# Altium PCB MacLayout.PcbDoc (part 2 of 2)
Units mil, origin at the board's own origin, x right, y up, seen from the top; angles counter-clockwise.
Board outline 5984.25 x 2047.24 mil, 4 copper layers (Top Layer, Int2 (Sign), Int3 (Sign), Bottom Layer), stack 58.312 mil thick; 135 components, 109 nets, 624 pads, 48 vias.
Unrouted connection lines stored in the file: 142.
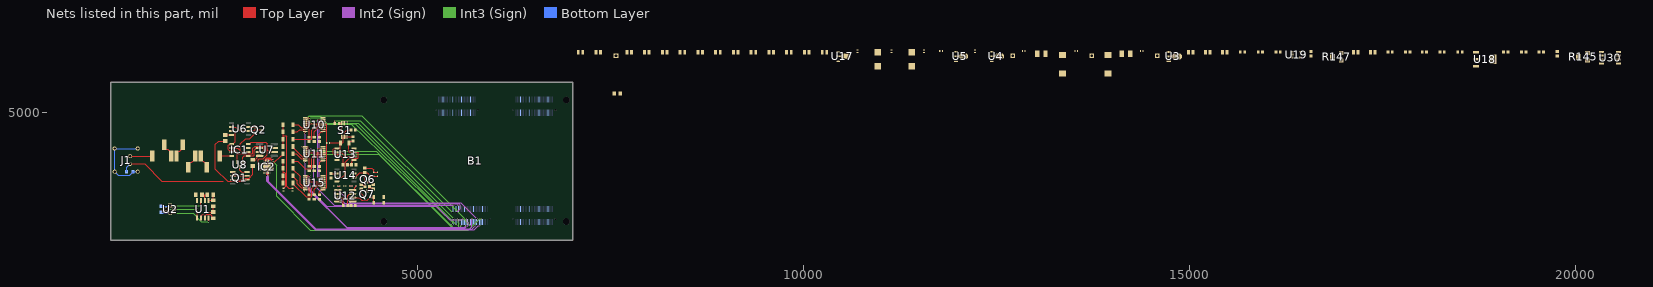
[diagram p4: the nets of this part, all layers, seen from the top]

## Part data (continued)
U1 U13 U30: library part CMP-0272-00256-3, "11 MHz, Precision, Low Noise, Rail-to-Rail Output, JFET Operational Amplifier, 4.5 to 36 V, -40 to 125 degC, 8-pin SOIC (D8), Green (RoHS & no Sb/Br)", Manufacturer="Texas Instruments", Rating=Catalog, Total Supply Voltage(Max)(+5V is 5, +/-5V is 10)=36, Total Supply Voltage(Min)(+5V is 5, +/-5V is 10)=4.5, CMRR(Min)(dB)=126, Code_JEDEC=MS-012, ComponentLink1Description="Manufacturer URL", ComponentLink1URL=http://www.ti.com/, ComponentLink2Description=Datasheet, ComponentLink2URL=http://www.ti.com/lit/ds/symlink/opa2140.pdf, ComponentLink3Description="Package Specification", ComponentLink3URL=http://www.ti.com/litv/pdf/msoi002j, DatasheetVersion=SBOS498A, Eco-Plan="Green (RoHS & no Sb/Br)", GBW(Typ)(MHz)=11, IIB(Max)(pA)=10, Iq per channel(Max)(mA)=2, Mounting Technology="Surface Mount", Number of Channels=2, Offset Drift(Typ)(uV/C)=0.35, PackageDescription="8-Pin Plastic Small Outline, Body 4.9 x 3.9 mm, Pitch 1.27 mm", PackageReference=D0008A, PackageVersion="4040047-3/M, 06/2011", Packing="LARGE T&R", PartNumber=OPA2140AIDR, Slew Rate(Typ)(V/us)=20, Sub Family="High Supply Voltage Amplifier (>=30V), Low Input Bias Current Amp (<=10pA), Low Noise Amp (<=10nV/rtHz), Low Offset Voltage Amplifier (<=500uV), Precision Amplifier", Vio (25C)(Max)(mV)=0.12
U2: library part CMP-09137-000115-1, "IC VREF SHUNT 0.17% TO46-4", Case/Package=TO-46, Cathode Current=500uA, Max Operating Temperature=70°C, Max Output Voltage=6.95V, Min Operating Temperature=0°C, Output Current=10mA, Package Quantity=20, Temperature Coefficient=1ppm/°C, Tolerance=2%, Mount="Through Hole", Number of Channels=1, Number of Pins=4, Output Voltage=6.95V, Packaging=Rail/Tube, Radiation Hardening=No, Reference Type=Shunt, RoHS Compliant=Yes
U3: library part CMP-0244-00386-1, "Positive Voltage Regulator, 15V, 4-Pin SOT-89, Tape and Reel", ComponentLink1Description="Manufacturer URL", ComponentLink1URL=http://www.st.com, ComponentLink2Description=Datasheet, ComponentLink2URL=http://www.st.com/internet/com/TECHNICAL_RESOURCES/TECHNICAL_LITERATURE/DATASHEET/CD00000446.pdf, DatasheetVersion=1/02/2011, PackageDescription="3-Pin SOT-89 Package 1.5 mm Pitch, 4.1 mm Lead Span", PackageReference=SOT-89, PackageVersion=2011
U4: library part CMP-0244-00408-1, "Negative Voltage Regulator, -15V, 4-Pin SOT-89, Tape and Reel", ComponentLink1Description="Manufacturer URL", ComponentLink1URL=http://www.st.com, ComponentLink2Description=Datasheet, ComponentLink2URL=http://www.st.com/internet/com/TECHNICAL_RESOURCES/TECHNICAL_LITERATURE/DATASHEET/CD00000539.pdf, DatasheetVersion=1/07/2009, PackageDescription="3-Pin SOT-89 Package 1.5 mm Pitch, 4.1 mm Lead Span", PackageReference=SOT-89, PackageVersion=2011
U5: library part CMP-0244-00406-1, "Positive Voltage Regulator, 5V, 4-Pin SOT-89, Tape and Reel", ComponentLink1Description="Manufacturer URL", ComponentLink1URL=http://www.st.com, ComponentLink2Description=Datasheet, ComponentLink2URL=http://www.st.com/internet/com/TECHNICAL_RESOURCES/TECHNICAL_LITERATURE/DATASHEET/CD00000446.pdf, DatasheetVersion=1/02/2011, PackageDescription="3-Pin SOT-89 Package 1.5 mm Pitch, 4.1 mm Lead Span", PackageReference=SOT-89, PackageVersion=2011
U6 U14: library part CMP-0271-00131-3, "11 MHz, Single Supply, Low Noise, Precision, Rail-to-Rail Output, JFET Amplifier, 4.5 to 36 V, -40 to 125 degC, 8-pin SOIC (D8), Green (RoHS & no Sb/Br)", Manufacturer="Texas Instruments", Rating=Catalog, Total Supply Voltage(Max)(+5V is 5, +/-5V is 10)=36, Total Supply Voltage(Min)(+5V is 5, +/-5V is 10)=4.5, CMRR(Min)(dB)=126, Code_JEDEC=MS-012, ComponentLink1Description="Manufacturer URL", ComponentLink1URL=http://www.ti.com/, ComponentLink2Description=Datasheet, ComponentLink2URL=http://www.ti.com/lit/ds/symlink/opa140.pdf, ComponentLink3Description="Package Specification", ComponentLink3URL=http://www.ti.com/litv/pdf/msoi002j, DatasheetVersion=SBOS498A, Eco-Plan="Green (RoHS & no Sb/Br)", GBW(Typ)(MHz)=11, IIB(Max)(pA)=10, Iq per channel(Max)(mA)=2, Mounting Technology="Surface Mount", Number of Channels=1, Offset Drift(Typ)(uV/C)=0.35, PackageDescription="8-Pin Plastic Small Outline, Body 4.9 x 3.9 mm, Pitch 1.27 mm", PackageReference=D0008A, PackageVersion="4040047-3/M, 06/2011", Packing=TUBE, PartNumber=OPA140AID, Slew Rate(Typ)(V/us)=20, Sub Family="High Supply Voltage Amplifier (>=30V), Low Input Bias Current Amp (<=10pA), Low Noise Amp (<=10nV/rtHz), Low Offset Voltage Amplifier (<=500uV), Precision Amplifier", Vio (25C)(Max)(mV)=0.12
U7: library part CMP-0359-03002-2, "Single Channel, Low Noise High Speed Operational Amplifier, 20 MHz Typical GBW, 6 V/us Typical SR, 8 to 44 V, 8-Pin SOIC (S8-8), Commercial, Pb-Free", Linear Technology Part Number=LT1128, Manufacturer="Linear Technology", Channels (#)=1, ComponentLink1Description="Manufacturer URL", ComponentLink1URL=http://www.linear.com/, ComponentLink2Description=Datasheet, ComponentLink2URL=http://cds.linear.com/docs/en/datasheet/1028fb.pdf, ComponentLink3Description="Package Specification", ComponentLink3URL=http://cds.linear.com/docs/en/packaging/05081610_G_SO8.pdf, DatasheetVersion="Rev. B", GBW (MHz) Typical=20, Is (mA) Typical=7.4, Mounting Technology="Surface Mount", PackageDescription="8-Pin Plastic Small Outline, Body 4.9 x 3.9 mm, Pitch 1.27 mm", PackageReference=LT-S8-8, PackageVersion="Rev G", PartNumber=LT1128CS8#PBF, RevisionNote="URLs updated", RoHS=Pb-Free, SR (V/us) Typical=6, Type=VFB, Vos (mV) Typical=0.01, Vs Max (V)=44, Vs Min (V)=8
U8: library part CMP-0023-00636-1, "30k 2 kV ESD Precision-Matched Resistor-Divider, -40 to 85 degC, 3-pin SOT (U3+2), Pb-Free, Tape and Reel", PartNumber=MAX5491LC01000+T, Applications="Precision Voltage Divider", Code_JEDEC=TO236, ComponentLink1Description="Manufacturer URL", ComponentLink1URL=http://www.maximintegrated.com/, ComponentLink2Description=Datasheet, ComponentLink2URL=http://datasheets.maximintegrated.com/en/ds/MAX5491.pdf, ComponentLink3Description="Package Specification", ComponentLink3URL=http://pdfserv.maximintegrated.com/package_dwgs/21-0051.PDF, DatasheetVersion="Rev. 3", Mounting Technology="Surface Mount", PackageDescription="3-Pin Small-Outline Transistor Package (U3+2), Body 2.92 x 1.3 mm, Pitch 0.95 mm", PackageReference=U3+2, PackageVersion="Rev. J, 06/2012"
U10 U11 U15: library part CMP-04892-000026-1, "IC SWITCH"
U12: library part CMP-04896-000132-1, "IC PREC COMP ULTRA-FAST 8-SOIC", Case/Package=SOIC, Dual Supply Voltage=5V, Input Bias Current=10uA, Input Offset Voltage (Vos)=3mV, Max Operating Temperature=85°C, Max Power Dissipation=725mW, Max Supply Current=12.5mA, Max Supply Voltage=10V, Min Operating Temperature=-40°C, Nominal Supply Current=10.6mA, Output Current=20mA, Package Quantity=2500, Power Supply Rejection Ratio (PSRR)=72dB, Common Mode Rejection Ratio=97dB, Height=1.58mm, Lead Free="Lead Free", Length=4.9mm, Max Input Current=10uA, Min Supply Voltage=5V, Mount="Surface Mount", Number of Channels=1, Number of Elements=1, Number of Pins=8, Output Type=TTL, Packaging="Tape and Reel", Power Dissipation=725mW, Propagation Delay=10ns, Quiescent Current=12.5mA, Radiation Hardening=No, Response Time=0.0078us, RoHS Compliant=Yes, Series=-, Supply Current=10.6mA, Technology=BICMOS, Weight=0.002561oz, Width=3.91mm
U17: library part CMP-0244-00397-1, "Negative Voltage Regulator, -5V, 4-Pin SOT-89, Tape and Reel", ComponentLink1Description="Manufacturer URL", ComponentLink1URL=http://www.st.com, ComponentLink2Description=Datasheet, ComponentLink2URL=http://www.st.com/internet/com/TECHNICAL_RESOURCES/TECHNICAL_LITERATURE/DATASHEET/CD00000539.pdf, DatasheetVersion=1/07/2009, PackageDescription="3-Pin SOT-89 Package 1.5 mm Pitch, 4.1 mm Lead Span", PackageReference=SOT-89, PackageVersion=2011
U18: library part CMP-0244-00306-1, "Fixed Low Drop Positive Voltage Regulator, 4-Pin SOT-223, Tape and Reel", ComponentLink1Description="Manufacturer URL", ComponentLink1URL=http://www.st.com, ComponentLink2Description=Datasheet, ComponentLink2URL=http://www.st.com/internet/com/TECHNICAL_RESOURCES/TECHNICAL_LITERATURE/DATASHEET/CD00000544.pdf, DatasheetVersion=1/11/2011, PackageDescription="4-Pin SOT-223 Package, 6.5 x 3.5 mm Body, 2.3 mm Pitch, 7 mm Lead Span", PackageReference=SOT-223, PackageVersion=2010
U19: library part CMP-0394-00284-2, "Single Output High PSRR LDO, 200 mA, Fixed -2.5 V Output, -10 to -2.7 V Input, 5-pin SOT-23 (DBV), -40 to 125 degC, Green (RoHS & no Sb/Br)", Manufacturer="Texas Instruments", Accuracy(%)=2, Code_JEDEC=MO-178, ComponentLink1Description="Manufacturer URL", ComponentLink1URL=http://www.ti.com/, ComponentLink2Description=Datasheet, ComponentLink2URL=http://www.ti.com/general/docs/lit/getliterature.tsp?genericPartNumber=TPS72325&fileType=pdf, ComponentLink3Description="Package Specification", ComponentLink3URL=http://www.ti.com/litv/pdf/mpds018i, DatasheetVersion=SLVS346B, Eco-Plan="Green (RoHS & no Sb/Br)", Fixed Output Options(V)=-2.5, Iout(Max)(A)=0.2, Iq(Typ)(mA)=0.13, Mounting Technology="Surface Mount", PackageDescription="5-Pin Plastic Small Outline, Body 1.60 Ãƒâ€” 2.90 mm, Pitch 0.95 mm", PackageReference=DBV0005A, PackageVersion=4073253-4/K, PartNumber=TPS72325DBVT, SubFamily="Single Channel LDO", Vdo(Typ)(mV)=280, Vin(Max)(V)=-2.7, Vin(Min)(V)=-10, Vout Adj(Max)(V)=-2.5, Vout Adj(Min)(V)=-2.5
P3 P4 P5 P7: LatestRevisionDate=17-Jul-2002, LatestRevisionNote="Re-released for DXP Platform.", Publisher="Altium Limited"

## Via types
v1: diameter 19.68, hole 11.81, Top Layer to Bottom Layer, 48 vias

## Nets (pads, with @x,y where several pads share a name; then routed paths per layer and width w, separated by ;. In a path a pad name is that pad's centre, name@x,y a point inside that pad or via, vN(x,y) a via of type N, cw(c..) or ccw(c..) an arc to the next point about the centre after c; other vN are vias at no path point)
2V5_ADC: C15.1 D6.2 D7.1 R55.1 R145.1 U12.1
5V_Main: C8.1 C14.1 R54.2 U5.1 U30.8
15V0_ADC: L10.2
15V0_FE: L9.2
15V_Main: C3.2 L7.1 L8.1 L9.1 L10.1 U3.1
15V_REF: C32.2 L8.2 R1.2 U1.8 U2.3 | length 704.8
  Top Layer w10: U1.8@2294.67,3634.68 2294.97,3634.38 2294.97,3586.91 v1(2295.28,3586.61)
  Int3 (Sign) w10: U2.3@1794.33,3694.96 2092.44,3694.96 2200.79,3586.61 v1(2295.28,3586.61)
  Bottom Layer w10: R1.2@1688.03,3705.59 1698.66,3694.96 U2.3@1794.33,3694.96
18V0_IN: C2.2 P3.1 U3.3 U5.3
+15V0_ADC: C48.1 C49.1 C50.1 C51.1 IC2.13 S1.9 U13.8 U14.7
+15VA: C45.1 C47.1 IC1.3 L7.2 Q2.1 U6.7 U7.7 | length 95
  Top Layer w15: U6.7@2810.82,4810.99 2811.04,4810.77 2905.46,4810.77 Q2.1@2905.67,4810.56
+VSWITCH: C66.2 C67.2 C68.2 IC2.14 R146.1 U10.16 U11.16 U15.16 | length 817.1
  Top Layer w10: U15.16@3546.3,4000.43 3547.24,3999.49 v1(3547.24,3980.07) ; U11.16@3546.3,4376.76 3547.24,4375.81 v1(3547.24,4354.21) ; U10.16@3546.3,4753.08 3547.24,4752.13 v1(3547.24,4728.35)
  Int2 (Sign) w10: v1(3547.24,3980.07) v1(3547.24,4354.21) v1(3547.24,4728.35)
-2V5_ADC: C17.1 C59.2 D8.2 D9.1 R57.1 R147.3 U12.4 | length 87.6
  Top Layer w10: U12.4@4156.13,3995.53 4180.8,3995.53 4187.49,4002.23 4187.49,4026.89 4199.25,4038.65 4199.25,4045.2 4202.13,4048.07 D9.1@4203.7,4048.07
-5V_Main: C10.2 C18.1 R56.2 R58.2 U17.3 U30.4
-15V0_ADC: C56.2 C57.2 C58.2 IC2.3 L14.2 S1.6 U13.4 U14.4
-15V0_FE: L13.2
-15V_Main: C6.1 L11.1 L12.1 L13.1 L14.1 U4.3
-15V_REF: C39.1 L12.2 U1.4
-15VA: C54.2 C55.2 IC1.7 L11.2 R8.1 R37.1 U6.4 U7.4 | length 182.6
  Top Layer w15: R37.1@2507.87,4708.66 2510.2,4710.99 U6.4@2588.38,4710.99 ; R8.1@2890.41,4376.62 2925.42,4411.64 2925.42,4433.33 2931.23,4439.13 U7.4@2952.92,4439.13
-18V0_IN: C5.1 P5.1 U4.2 U17.2
-VSWITCH: C69.1 C71.1 C72.1 R148.1 U10.7 U11.7 U15.7 | length 963.9
  Top Layer w10: v1(3707.04,4152.98) 3707.54,4153.48 3774.14,4153.48 U15.7@3774.64,4153.98 ; v1(3707.83,4529.23) 3710.45,4529.23 3718.11,4536.89 3735.8,4536.89 3738.53,4534.16 3770.78,4534.16 U11.7@3774.64,4530.3 ; v1(3708.66,4908.66) 3710.6,4906.72 3774.54,4906.72 U10.7@3774.64,4906.62
  Int2 (Sign) w10: v1(3707.04,4152.98) 3707.04,4903.89 3708.66,4905.51 v1(3708.66,4908.66)
GND: B1.AB_4 B1.AB_10 B1.AB_16 B1.AB_22 B1.AB_29 B1.AB_35 B1.AB_41 B1.AB_47 B1.BB_4 B1.BB_10 B1.BB_16 B1.BB_22 B1.BB_29 B1.BB_35 B1.BB_41 B1.BB_47 B1.CB_4 B1.CB_10 B1.CB_16 B1.CB_22 B1.CB_29 B1.CB_35 B1.CB_41 B1.CB_47 B1.DB_4 B1.DB_10 B1.DB_16 B1.DB_22 B1.DB_29 B1.DB_35 B1.DB_41 B1.DB_47 C1.2 C2.1 C3.1 C5.2 C6.2 C8.2 C10.1 C14.2 C15.2 C16.1 C17.2 C18.2 C32.1 C39.2 C45.2 C47.2 C48.2 C49.2 C50.2 C51.2 C54.1 C55.1 C56.1 C57.1 C58.1 C59.1 C66.1 C67.1 C68.1 C69.2 C71.2 C72.2 D5.1 D11.2 IC2.4 IC2.12 IC2.21 J1.2 P4.1 P7.1 R5.2 R6.1 R12.2 R15.2 R17.2 R20.2 R23.2 R25.1 R27.2 R30.1 R40.1 R46.2 R48.2 R49.2 R145.3 R147.1 S1.8 U1.5 U2.2 U2.4 U3.2 U4.1 U5.2 U10.8 U11.8 U12.6 U13.3 U15.8 U17.1 U18.1 U19.1 | length 1931.7
  Top Layer w10: J1.2@1275.59,4333.07 1466.14,4333.07 1688.98,4110.24 2484.25,4110.24 ; v1(2145.67,3744.09) 2144.63,3743.06 U1.5@2144.63,3634.72 ; U1.5@2144.63,3634.72 U1.5@2144.67,3634.68
  Int3 (Sign) w10: U2.2@1744.33,3744.96 U2.4@1844.33,3744.96 2144.81,3744.96 v1(2145.67,3744.09)
  Bottom Layer w15: C1.2@1231.3,4232.28 1231.3,4288.78 J1.2@1275.59,4333.07
Main_Input: J1.1 R31.1 | length 289
  Top Layer w15: J1.1@1275.59,4433.07 1559.06,4433.07 R31.1@1562.99,4437.01
NetB1_CB_2: B1.CB_2 U10.11 | length 2467.5
  Top Layer w10: U10.11@3546.3,4881.03 3598.6,4881.03 v1(3602.36,4877.27)
  Int3 (Sign) w3.94: v1(3602.36,4877.27) 3633.17,4846.46 4138,4846.46 cw(c4138,4842.52) 4140.73,4845.35 5456.2,3576.1 5457.38,3574.91 5457.38,3572.78 v1(5450.59,3546.94)
NetB1_CB_3: B1.CB_3 U10.10 | length 2527.1
  Top Layer w10: U10.10@3546.3,4906.62 3600.32,4906.62 v1(3602.36,4908.66)
  Int3 (Sign) w3.94: v1(3602.36,4908.66) 3600.89,4908.66 3586.67,4922.88 3586.67,4937.74 3596.96,4948.03 3740.95,4948.03 3826.77,4862.2 4232.28,4862.2 v1(5468.5,3625.98)
NetB1_CB_5: B1.CB_5 U10.9 | length 2540.1
  Top Layer w10: U10.9@3546.3,4932.21 3546.3,4933.07 3602.36,4933.07 v1(3602.76,4932.67)
  Int3 (Sign) w3.94: v1(3602.76,4932.67) 3745.17,4932.67 3823.51,4854.33 4192.13,4854.33 v1(5507.87,3538.58)
NetB1_CB_6: B1.CB_6 U11.11 | length 2517.9
  Top Layer w10: U11.11@3546.3,4504.71 3602.36,4504.71 v1(3602.36,4503.94)
  Int3 (Sign) w3.94: v1(3602.36,4503.94) 3718.36,4503.94 3722.15,4500.15 4467.68,4500.15 5459.95,3507.87 5525.25,3507.87 5535.43,3518.05 5535.43,3565.95 5527.56,3573.83 v1(5527.56,3625.98)
NetB1_CB_8: B1.CB_8 U11.9 | length 2635.1
  Top Layer w10: v1(3499.14,4554.77) 3580.82,4554.77 3580.82,4555.89 U11.9@3546.3,4555.89
  Int3 (Sign) w3.94: v1(3499.14,4554.77) 3507.19,4554.77 3605.27,4456.69 4500,4456.69 5456.69,3500 5535.43,3500 v1(5566.93,3531.5)
NetB1_CB_9: B1.CB_9 U15.11 | length 2345.4
  Top Layer w10: U15.11@3546.3,4128.39 3599.96,4128.39 3600.51,4127.84 3615.47,4127.84 v1(3617.32,4125.98)
  Int2 (Sign) w3.94: v1(3617.32,4125.98) 3617.32,4122.89 3610.24,4115.8 3610.24,3998.65 3821.48,3787.4 5243.02,3787.4 5419.4,3611.02 5571.65,3611.02 v1(5586.61,3625.98)
NetB1_CB_11: B1.CB_11 U15.10 | length 2446.1
  Top Layer w10: U15.10@3546.3,4153.98 3602.36,4153.98 v1(3602.36,4153.54)
  Int2 (Sign) w3.94: v1(3602.36,4153.54) 3599.35,4150.53 3599.35,4144.29 3598.43,4143.36 3598.43,3999.32 4081.21,3516.54 5611.02,3516.54 v1(5625.98,3531.5)
NetB1_CB_12: B1.CB_12 U15.9 | length 2625
  Top Layer w10: U15.9@3546.3,4179.57 3602.36,4179.57 v1(3602.36,4181.1)
  Int2 (Sign) w3.94: v1(3602.36,4181.1) 3586.61,4165.35 3586.61,4000 4082.68,3503.94 5619.58,3503.94 5655.85,3540.2 5655.85,3575.87 5645.67,3586.05 v1(5645.67,3625.98)
NetB1_CB_15: B1.CB_15 IC2.9 | length 3116.3
  Top Layer w3.94: IC2.9@3068.29,4218.02 3068.29,4191.88 3074.8,4185.36 v1(3074.8,4181.1)
  Int2 (Sign) w3.94: v1(3074.8,4181.1) 3074.8,4101.01 3679.75,3496.06 5681.1,3496.06 5704.72,3519.69 v1(5704.72,3625.98)
NetB1_CB_17: B1.CB_17 IC2.19 | length 3397.8
  Top Layer w3.94: IC2.19@3028.92,4371.57 3028.92,4395.06 3044.32,4410.46 v1(3111.25,4410.46)
  Int2 (Sign) w3.94: v1(3111.25,4410.46) 3059.23,4358.44 3059.23,4105.45 3676.49,3488.19 5699.04,3488.19 v1(5743.98,3533.13)
NetB1_CB_18: B1.CB_18 U12.5 | length 1948.6
  Int2 (Sign) w3.94: v1(3968.5,3996.06) 4133.86,3830.71 5559.06,3830.71 v1(5763.78,3625.98)
NetB1_CB_20: B1.CB_20 IC2.8 | length 3151.1
  Top Layer w3.94: v1(3044.27,4181.36) 3044.66,4181.75 3044.66,4214.08 IC2.8@3048.6,4218.02
  Int2 (Sign) w3.94: v1(3044.27,4181.36) 3044.88,4180.75 3044.88,4108.66 3673.23,3480.32 5732.28,3480.32 5783.46,3531.5 v1(5803.15,3531.5)
NetB1_CB_21: B1.CB_21 IC2.17 | length 3449.3
  Top Layer w3.94: IC2.17@3068.29,4371.57 3070.87,4374.15 3070.87,4384.97 3079.31,4393.42 3096,4393.42 3119.33,4370.08 v1(3122.05,4370.08)
  Int3 (Sign) w3.94: v1(3122.05,4370.08) 3172.77,4319.36 3172.77,3913.85 3610.24,3476.38 5653.54,3476.38 5803.15,3625.98 v1(5822.83,3625.98)
NetB1_CB_45: B1.CB_45 U12.8 | length 1551.1
  Int2 (Sign) w3.94: v1(3996.06,3846.46) 4027.56,3814.96 5511.81,3814.96 v1(5527.56,3799.21)
NetB1_CB_46: B1.CB_46 R29.2 U12.7 | length 1893.2
  Top Layer w10: U12.7@3966.09,3895.53 3984.25,3895.53 4029.67,3895.53 4038.39,3886.81 R29.2@4038.39,3795.28
  Int2 (Sign) w3.94: v1(3984.25,3897.64) 4059.06,3822.83 5531.5,3822.83 5555.12,3799.21 5555.12,3751.97 v1(5507.86,3704.72)
NetB1_CB_48: B1.CB_48 U11.10 | length 2474.2
  Top Layer w10: U11.10@3546.3,4530.3 3602.42,4530.3 v1(3602.42,4530.07)
  Int2 (Sign) w3.94: v1(3602.42,4530.07) 3604.98,4527.51 3618.16,4527.51 3657.48,4488.19 3657.48,4062.99 3921.26,3799.21 v1(5468.5,3799.21)
NetB1_CB_49: B1.CB_49 R14.2 | length 2048.4
  Top Layer w10: R14.2@3927.17,4858.27 3929.13,4860.24 v1(3929.13,4893.7)
  Int3 (Sign) w3.94: v1(3929.13,4893.7) 4259.84,4893.7 v1(5448.82,3704.72)
NetC1_1: C1.1 J1.4 J1.5 J1.6 J1.7 | length 942.7
  Bottom Layer w15: J1.7@1375.59,4233.07 1312.8,4233.07 C1.1@1312.01,4232.28 1312.01,4227.36 1269.68,4185.04 1123.62,4185.04 J1.6@1075.59,4233.07 J1.5@1075.59,4533.07 J1.4@1375.59,4533.07
NetC4_1: C4.1 R16.1 U13.7 U14.3 | length 853.7
  Top Layer w10: U14.3@3953.56,4158.79 4023.96,4158.79 4064.63,4199.45 4064.63,4355.97 4115.74,4407.08 4226.43,4407.08 4232.28,4412.94 4232.28,4475.96 4226.43,4481.82 U13.7@4176,4481.82 4116.61,4481.82 4110.24,4488.19 C4.1@4110.24,4606.3 4110.24,4615.24 4123.94,4628.94 R16.1@4165.35,4628.94
NetC4_2: C4.2 L2.2 S1.2 U13.2 U13.6 | length 626
  Top Layer w10: L2.2@3857.36,4606.3 C4.2@4000,4606.3 ; U13.2@3953.56,4481.82 4000,4481.82 ; S1.2@4036.42,4685.9 4036.42,4613.14 4030.56,4607.28 4009.96,4607.28 4005.47,4611.77 C4.2@4000,4606.3 ; U13.6@4176,4431.82 4064.25,4431.82 4014.25,4481.82 4000,4481.82 ; 4000,4481.82 C4.2@4000,4606.3
NetC16_2: C16.2 U19.4
NetD5_2: D5.2 D6.1 | length 26.8
  Top Layer w10: D6.1@3965.35,4047.24 D5.2@3992.13,4047.24
NetD7_2: D7.2 D8.1 Q7.2 U12.2 | length 380
  Top Layer w10: U12.2@4156.13,3895.53 4246.2,3895.53 4275.59,3866.14 4348.84,3866.14 4373.7,3891.01 4375.67,3891.01 4386.42,3901.75 Q7.2@4386.42,3903.72 4429.9,3903.72 D8.1@4431.69,3905.51 D7.2@4431.69,3830.71
NetD9_2: D9.2 D11.1 | length 29.2
  Top Layer w10: D11.1@4122.83,4047.24 4123.25,4047.66 4151.32,4047.66 D9.2@4151.73,4048.07
NetD10_1: D10.1 D12.2 R30.2 R36.1 U14.2 | length 279.6
  Top Layer w10: R30.2@3877.95,4209.65 3878.81,4208.79 U14.2@3953.56,4208.79 ; R36.1@4314.96,4280.51 4408.46,4280.51 4433.07,4255.91 D12.2@4433.07,4226.77 4433.32,4227.02 4478.77,4227.02 D10.1@4479.02,4227.27
NetD10_2: D10.2 D12.1 Q6.1 R36.2 U14.6 | length 346.9
  Top Layer w10: U14.6@4176,4158.79 4195.68,4158.79 4253.43,4216.54 4347.44,4216.54 4388.78,4175.2 Q6.1@4388.78,4173.23 4390.35,4174.8 D12.1@4433.07,4174.8 4433.32,4175.05 4478.77,4175.05 D10.2@4479.02,4175.3
NetIC1_1: IC1.1 U6.3 U7.3 U8.2 | length 1141.6
  Top Layer w15: U6.3@2588.38,4760.99 2593.68,4755.69 2628.29,4755.69 2637.07,4746.9 2637.07,4618.58 2615.35,4596.85 2615.35,4594.43 2610.05,4589.13 IC1.1@2592.83,4589.13 2587.54,4583.84 2556.03,4583.84 2547.24,4575.05 2547.24,4522.15 2556.03,4513.36 2636.24,4513.36 2662.2,4487.41 2662.2,4464.57 ; U8.2@2662.2,4359.18 2662.2,4464.57 ; U7.3@2952.92,4489.13 2987.48,4489.13 3013.57,4515.22 3013.57,4548.46 2998.47,4563.56 2895.18,4563.56 2866.14,4534.52 2866.14,4473.69 2857.35,4464.9 2662.53,4464.9 2662.2,4464.57
NetIC1_2: IC1.2 IC1.6 Q2.2 | length 584.3
  Top Layer w15: IC1.2@2592.83,4539.13 2669.53,4539.13 2704.72,4503.94 ; IC1.6@2806.37,4489.13 2719.53,4489.13 2704.72,4503.94 ; Q2.2@2905.67,4735.76 2903.7,4735.76 2829.37,4661.42 2771.65,4661.42 2704.72,4594.49 2704.72,4503.94
NetIC1_4: IC1.4 R35.2 | length 156.7
  Top Layer w15: R35.2@2437.01,4437.01 2439.13,4439.13 IC1.4@2592.83,4439.13
NetIC1_5: IC1.5 U7.2 U8.1 | length 359.9
  Top Layer w15: U8.1@2737,4359.18 2737,4418.11 2758.03,4439.13 IC1.5@2806.37,4439.13 2877.04,4439.13 2885.83,4447.92 2885.83,4507.47 2913.38,4535.03 2948.82,4535.03 U7.2@2952.92,4539.13
NetIC1_8: IC1.8 IC2.2 U7.6 | length 761.7
  Top Layer w10: IC2.2@2971.83,4314.48 2942.87,4314.48 2937.01,4320.34 2937.01,4389.76 2948.82,4401.57 3003.94,4401.57 3055.12,4452.76 3055.12,4515.75 3055.12,4519.69 ; 3081.74,4489.13 U7.6@3145.83,4489.13
  Top Layer w15: IC1.8@2806.37,4589.13 2823.6,4589.13 2848.64,4614.17 3035.5,4614.17 3055.12,4594.55 3055.12,4519.69 ; 3055.12,4515.75 3076.77,4494.09 3081.74,4489.13
NetIC2_1: IC2.1 IC2.6 IC2.11 IC2.15 SS.1 | length 200.4
  Top Layer w10: IC2.15@3125.37,4334.16 3136.2,4334.16 3137.11,4335.07 3137.11,4345.9 3231.37,4440.16 3244.87,4440.16 3259.56,4454.85 SS.1@3259.56,4464.69
NetIC2_5: IC2.5
NetL1_1: L1.1 R9.1 R10.1 R13.1 R18.1 | length 1069.8
  Top Layer w10: R18.1@3259.56,4559.18 R13.1@3259.56,4653.67 3259.56,4700.91 ; R9.1@3259.56,4842.64 R10.1@3259.56,4748.16 3259.56,4700.91 ; L1.1@3381.61,4018.83 3331.56,4018.83 3307.09,4043.31 3307.09,4695.05 3301.23,4700.91 3259.56,4700.91
NetL1_2: L1.2 R2.2 R4.1 R43.1 U1.1 | length 129.9
  Top Layer w10: U1.1@2294.67,3857.12 2294.67,3857.2 2302.47,3865 R4.1@2353.34,3865 R2.2@2353.34,3932.89
NetL2_1: L2.1 U10.2 U10.5 U10.12 U11.2 U11.5 U11.12 U15.2 U15.5 U15.12 | length 1823.5
  Top Layer w10: U15.12@3546.3,4102.8 U15.5@3774.64,4102.8 3826.77,4102.8 ; U11.12@3546.3,4479.12 U11.5@3774.64,4479.12 3826.77,4479.12 ; U10.12@3546.3,4855.44 U10.5@3774.64,4855.44 3820.91,4855.44 3826.77,4849.58 3826.77,4778.67 ; U15.2@3774.64,4026.03 3820.91,4026.03 3826.77,4031.88 3826.77,4102.8 ; U11.2@3774.64,4402.35 3774.64,4405.51 3826.77,4405.51 ; U10.2@3774.64,4778.67 3826.77,4778.67 ; 3826.77,4102.8 3826.77,4405.51 ; 3826.77,4405.51 3826.77,4479.12 ; 3826.77,4479.12 3826.77,4778.67
NetL3_1: L3.1 R3.2 U1.7 | length 168.6
  Top Layer w10: U1.7@2244.67,3634.68 2244.67,3654.37 2271.41,3681.1 2314.46,3681.1 2332.57,3662.99 2332.57,3650.13 2351.19,3631.5 R3.2@2354.46,3631.5
NetL3_2: L3.2 R44.1 R45.1 R47.1 R50.1 | length 531.3
  Top Layer w10: R50.1@3259.56,4086.74 R47.1@3259.56,4181.23 3259.56,4228.47 ; R44.1@3259.56,4370.2 R45.1@3259.56,4275.72 3259.56,4228.47 ; L3.2@3263.5,4018.83 3269.4,4018.83 3293.15,4042.58 3293.15,4209.49 3274.17,4228.47 3259.56,4228.47
NetQ1_1: Q1.1 Q1.2 Q1.7 R43.2 | length 232.4
  Top Layer w15: Q1.1@2607.8,4228.24 Q1.2@2607.8,4178.24 Q1.7@2790.17,4178.24
NetQ1_3: Q1.3 R8.2 | length 397.1
  Top Layer w15: Q1.3@2607.8,4128.24 2717.3,4128.24 2739.41,4150.35 2819.76,4150.35 2866.14,4196.73 R8.2@2866.14,4307.09
NetQ1_6: Q1.6 R37.2 | length 949.9
  Top Layer w15: R37.2@2507.87,4629.92 2425.2,4629.92 2381.89,4586.61 2381.89,4263.01 2538.77,4106.13 2740.12,4106.13 2762.23,4128.24 Q1.6@2790.17,4128.24
NetQ1_8: Q1.8 U8.3 | length 142.3
  Top Layer w15: U8.3@2699.6,4292.25 2699.6,4249.22 2720.58,4228.24 Q1.8@2790.17,4228.24
NetQ2_3: Q2.3 U6.2 U6.6 | length 421.8
  Top Layer w15: U6.2@2588.38,4810.99 2645.71,4810.99 2695.71,4760.99 U6.6@2810.82,4760.99 2881.27,4760.99 2893.44,4773.16 Q2.3@2984.41,4773.16
NetQ6_2: Q6.2 R22.1 R26.1 | length 187.6
  Top Layer w10: R22.1@4270.84,4067.87 4283.56,4055.16 4306.07,4055.16 R26.1@4313.98,4047.24 ; Q6.2@4313.98,4173.23 R26.1@4313.98,4047.24 ; R26.1@4318.9,4039.37 4318.9,4042.32 R26.1@4313.98,4047.24
NetQ6_3: Q6.3 R28.1 | length 86.1
  Top Layer w10: Q6.3@4351.38,4094.49 4395.59,4094.49 4423.13,4066.95 R28.1@4426.08,4066.95
NetQ7_1: Q7.1 R22.2 | length 124
  Top Layer w10: R22.2@4270.84,4010.78 4270.84,3946.46 4311.61,3905.69 Q7.1@4311.61,3903.72
NetQ7_3: Q7.3 R26.2 R28.2 | length 130.3
  Top Layer w10: Q7.3@4349.02,3982.46 4349.02,3984.43 4359.76,3995.18 4361.73,3995.18 4375.98,4009.43 R26.2@4375.98,4036.42 ; R26.2@4375.98,4039.37 R26.2@4375.98,4036.42 ; R28.2@4426.08,4009.86 4413.36,4022.58 4389.82,4022.58 R26.2@4375.98,4036.42
NetR1_1: R1.1 U1.3 U2.1 | length 566.5
  Top Layer w10: U1.3@2194.67,3857.12 2194.76,3857.04 v1(2194.84,3806.86) v1(2194.84,3806.86)
  Int3 (Sign) w10: U2.1@1794.33,3794.96 2180.32,3794.96 2192.22,3806.86 v1(2194.84,3806.86)
  Bottom Layer w10: R1.1@1688.03,3784.33 1783.7,3784.33 U2.1@1794.33,3794.96
NetR2_1: R2.1 R5.1 U1.2 | length 144.6
  Top Layer w10: R5.1@2207.48,3933.63 2208.2,3932.92 2241.41,3932.92 ; U1.2@2244.67,3857.12 2241.41,3860.39 2241.41,3932.92 ; R2.1@2274.62,3932.92 2241.41,3932.92
NetR3_1: R3.1 R4.2 U1.6 | length 279.1
  Top Layer w10: U1.6@2194.67,3634.68 2194.67,3654.37 2250.55,3710.24 R3.1@2354.46,3710.24 2354.46,3785.14 R4.2@2353.34,3786.26
NetR6_2: R6.2 S1.3 S1.4 | length 170.6
  Top Layer w10: S1.4@4075.79,4685.9 S1.3@4056.1,4685.9 4056.1,4745.08 4082.68,4771.65 R6.2@4136.81,4771.65
NetR9_2: R9.2 U10.14 | length 176.7
  Top Layer w10: R9.2@3385.54,4842.64 3452.63,4842.64 3491.02,4804.26 U10.14@3546.3,4804.26
NetR10_2: R10.2 U10.15 | length 173.4
  Top Layer w10: R10.2@3385.54,4748.16 3441.07,4748.16 3471.58,4778.67 U10.15@3546.3,4778.67
NetR12_1: R12.1 U10.13 | length 192.2
  Top Layer w10: U10.13@3546.3,4829.85 3550.15,4825.99 3587.39,4825.99 3595.02,4818.37 R12.1@3595.02,4679.61
NetR13_2: R13.2 U10.4 | length 524.3
  Top Layer w10: R13.2@3385.54,4653.67 3622.17,4653.67 3629.98,4661.48 3629.98,4767.78 3692.05,4829.85 U10.4@3774.64,4829.85
NetR14_1: R14.1 S1.1 S1.10 | length 206.1
  Top Layer w10: R14.1@3984.25,4858.27 4015.87,4858.27 S1.10@4016.73,4859.13 S1.1@4016.73,4685.9
NetR15_1: R15.1 U10.1 | length 105.4
  Top Layer w10: R15.1@3729.97,4679.61 3728.35,4681.23 3728.35,4727.45 3753.97,4753.08 U10.1@3774.64,4753.08
NetR16_2: R16.2 S1.5 | length 71.2
  Top Layer w10: S1.5@4094.57,4685 S1.5@4095.47,4685.9 4095.59,4686.02 R16.2@4165.35,4686.02
NetR17_1: R17.1 U10.3 | length 207
  Top Layer w10: R17.1@3661.95,4679.61 3661.95,4752.5 3713.71,4804.26 U10.3@3774.64,4804.26
NetR18_2: R18.2 U11.14 | length 230.1
  Top Layer w10: R18.2@3392.05,4552.67 R18.2@3385.54,4559.18 3385.54,4549.34 3506.94,4427.94 U11.14@3546.3,4427.94
NetR19_2: SS.2 U11.15 | length 186.6
  Top Layer w10: SS.2@3385.54,4464.69 3429.01,4464.69 3491.35,4402.35 U11.15@3546.3,4402.35
NetR20_1: R20.1 U11.13 | length 198.5
  Top Layer w10: U11.13@3546.3,4453.53 3589.78,4453.53 3597.77,4445.54 R20.1@3597.77,4301.77
NetR23_1: R23.1 U11.1 | length 106.6
  Top Layer w10: R23.1@3729.94,4300.76 3729.94,4352.73 3753.97,4376.76 U11.1@3774.64,4376.76
NetR24_1: R24.1 R25.2 U13.5 | length 131.9
  Top Layer w10: R24.1@4092.52,4322.83 4143.83,4322.83 4146.39,4325.4 4146.39,4352.21 4154.06,4359.88 4154.06,4374.02 4161.86,4381.82 U13.5@4176,4381.82
NetR24_2: R24.2 U13.1 | length 344.5
  Top Layer w10: U13.1@3953.56,4531.82 3950.19,4528.45 3911.94,4528.45 3909.45,4525.96 3909.45,4462.55 3915.31,4456.69 3988.19,4456.69 4035.43,4409.45 R24.2@4035.43,4322.83
NetR27_1: R27.1 U11.3 | length 226.7
  Top Layer w10: R27.1@3662.75,4300.76 3662.75,4406.84 3683.84,4427.94 U11.3@3774.64,4427.94
NetR29_1: R29.1 R40.2 U12.3 | length 196.7
  Top Layer w10: R29.1@4095.47,3795.28 4095.47,3921.23 4119.78,3945.53 U12.3@4156.13,3945.53
NetR31_2: R31.2 R32.1 | length 198.2
  Top Layer w15: R32.1@1716.54,4582.68 1716.54,4542.32 1737.58,4521.28 1763.17,4521.28 1807.09,4477.36 R31.2@1807.09,4437.01
NetR32_2: R32.2 R33.1 | length 190.3
  Top Layer w15: R33.1@1877.95,4437.01 1877.95,4477.36 1899,4498.41 1916.71,4498.41 1960.63,4542.32 R32.2@1960.63,4582.68
NetR33_2: R33.2 R34.1 | length 202.1
  Top Layer w15: R34.1@2027.56,4291.34 2027.56,4331.69 2048.6,4352.74 2078.13,4352.74 2122.05,4396.65 R33.2@2122.05,4437.01
NetR34_2: R34.2 R35.1 | length 186.4
  Top Layer w15: R35.1@2192.91,4437.01 2192.91,4396.65 2236.83,4352.74 2250.61,4352.74 2271.65,4331.69 R34.2@2271.65,4291.34
NetR44_2: R44.2 U11.4 | length 584.8
  Top Layer w10: R44.2@3385.54,4370.2 3448.69,4370.2 3547.24,4271.65 3624.06,4271.65 3629.92,4277.51 3629.92,4413.39 3670.06,4453.53 U11.4@3774.64,4453.53
NetR45_2: R45.2 U15.14 | length 313.4
  Top Layer w10: R45.2@3385.54,4275.72 3385.54,4265.87 3480.31,4171.1 3480.31,4078.74 3507.44,4051.62 U15.14@3546.3,4051.62
NetR46_1: R46.1 U15.13 | length 188.7
  Top Layer w10: U15.13@3546.3,4077.21 3589.16,4077.21 3595.02,4071.35 R46.1@3595.02,3933.82
NetR47_2: R47.2 U15.15 | length 252.6
  Top Layer w10: R47.2@3385.54,4181.23 3385.54,4171.38 3440.94,4115.98 3440.94,4078.74 3493.66,4026.03 U15.15@3546.3,4026.03
NetR48_1: R48.1 U15.1 | length 98.6
  Top Layer w10: R48.1@3729.97,3933.82 3728.35,3935.44 3728.35,3974.81 3753.97,4000.43 U15.1@3774.64,4000.43
NetR49_1: R49.1 U15.3 | length 205.2
  Top Layer w10: R49.1@3661.95,3933.82 3661.95,4008.41 3705.16,4051.62 U15.3@3774.64,4051.62
NetR50_2: R50.2 U15.4 | length 601
  Top Layer w10: R50.2@3385.54,4086.74 3385.54,4076.9 3556.93,3905.51 3622.05,3905.51 3629.92,3913.39 3629.92,4015.75 3691.38,4077.21 U15.4@3774.64,4077.21
NetR54_1: R54.1 U18.3
NetR55_2: R55.2 U18.2 U18.4
NetR56_1: R56.1 U19.2
NetR57_2: R57.2 U19.5
NetR58_1: R58.1 U19.3
NetR145_2: R145.2 U30.3
NetR146_2: R146.2 U30.1 U30.2
NetR147_2: R147.2 U30.5
NetR148_2: R148.2 U30.6 U30.7
SW_ENABLE: B1.CB_14 IC2.18 U10.6 U11.6 U15.6 | length 3915.9
  Top Layer w3.94: IC2.18@3048.6,4371.57 3048.6,4395.06 3054.83,4401.29 3099.26,4401.29 3105.05,4395.5 v1(3132,4395.5)
  Top Layer w10: v1(3728.12,4128.01) 3728.31,4128.2 3774.45,4128.2 U15.6@3774.64,4128.39 ; v1(3728.35,4515.11) 3730.97,4515.11 3737.51,4508.57 3770.78,4508.57 U11.6@3774.64,4504.71 ; v1(3728.35,4881.89) 3728.78,4881.46 3774.21,4881.46 U10.6@3774.64,4881.03
  Int2 (Sign) w10: v1(3728.12,4128.01) 3728.35,4128.01 v1(3728.35,4515.11) v1(3728.35,4881.89)
  Int3 (Sign) w3.94: v1(3728.35,4881.89) 3724.09,4881.89 3712.27,4893.7 3592.86,4893.7 3578.8,4907.76 3578.8,4941 3593.7,4955.91 4277.85,4955.91 5601.57,3632.18 5601.57,3614.96 v1(5685.04,3531.5)
pads on no net: B1.AB_1 B1.AB_2 B1.AB_3 B1.AB_5 B1.AB_6 B1.AB_7 B1.AB_8 B1.AB_9 B1.AB_11 B1.AB_12 B1.AB_13 B1.AB_14 B1.AB_15 B1.AB_17 B1.AB_18 B1.AB_19 B1.AB_20 B1.AB_21 B1.AB_23 B1.AB_24 B1.AB_25 B1.AB_26 B1.AB_27 B1.AB_28 B1.AB_30 B1.AB_31 B1.AB_32 B1.AB_33 B1.AB_34 B1.AB_36 B1.AB_37 B1.AB_38 B1.AB_39 B1.AB_40 B1.AB_42 B1.AB_43 B1.AB_44 B1.AB_45 B1.AB_46 B1.AB_48 B1.AB_49 B1.AB_50 B1.BB_1 B1.BB_2 B1.BB_3 B1.BB_5 B1.BB_6 B1.BB_7 B1.BB_8 B1.BB_9 B1.BB_11 B1.BB_12 B1.BB_13 B1.BB_14 B1.BB_15 B1.BB_17 B1.BB_18 B1.BB_19 B1.BB_20 B1.BB_21 B1.BB_23 B1.BB_24 B1.BB_25 B1.BB_26 B1.BB_27 B1.BB_28 B1.BB_30 B1.BB_31 B1.BB_32 B1.BB_33 B1.BB_34 B1.BB_36 B1.BB_37 B1.BB_38 B1.BB_39 B1.BB_40 B1.BB_42 B1.BB_43 B1.BB_44 B1.BB_45 B1.BB_46 B1.BB_48 B1.BB_49 B1.BB_50 B1.CB_1 B1.CB_7 B1.CB_13 B1.CB_19 B1.CB_23 B1.CB_24 B1.CB_25 B1.CB_26 B1.CB_27 B1.CB_28 B1.CB_30 B1.CB_31 B1.CB_32 B1.CB_33 B1.CB_34 B1.CB_36 B1.CB_37 B1.CB_38 B1.CB_39 B1.CB_40 B1.CB_42 B1.CB_43 B1.CB_44 B1.CB_50 B1.DB_1 B1.DB_2 B1.DB_3 B1.DB_5 B1.DB_6 B1.DB_7 B1.DB_8 B1.DB_9 B1.DB_11 B1.DB_12 B1.DB_13 B1.DB_14 B1.DB_15 B1.DB_17 B1.DB_18 B1.DB_19 B1.DB_20 B1.DB_21 B1.DB_23 B1.DB_24 B1.DB_25 B1.DB_26 B1.DB_27 B1.DB_28 B1.DB_30 B1.DB_31 B1.DB_32 B1.DB_33 B1.DB_34 B1.DB_36 B1.DB_37 B1.DB_38 B1.DB_39 B1.DB_40 B1.DB_42 B1.DB_43 B1.DB_44 B1.DB_45 B1.DB_46 B1.DB_48 B1.DB_49 B1.DB_50 B1.MH1 B1.MH2 B1.MH3 B1.MH4 B1.MH5 B1.MH6 B1.MH7 B1.MH8 B1.MH9 B1.MH10 B1.MH11 B1.MH12 IC2.7 IC2.10 IC2.16 IC2.20 Q1.4 Q1.5 S1.7 U6.1 U6.5 U6.8 U7.1 U7.5 U7.8 U14.1 U14.5 U14.8
copper on no net: | length 3784.5
  Top Layer w31.5: 1791.33,3546.67 cw(c1795.28,3748.03) 1795.28,3546.63
  Int2 (Sign) w31.5: 1791.85,3547.28 cw(c1795.8,3748.65) 1795.8,3547.24
  Bottom Layer w31.5: 1791.33,3547.28 cw(c1795.28,3748.65) 1795.28,3547.24

## Polygon pours and split planes (outlines as drawn)
GND on Bottom Layer "NONET_L-01_P-001" (solid, shelved, pour order 0): 7007.87,5393.7 7007.87,3346.46 2464.57,3346.46 2464.57,5393.7
GND on Top Layer "NONET_L-01_P-001" (solid, shelved, pour order 1): 7007.87,5393.7 7007.87,3346.46 2464.57,3346.46 2464.57,5393.7

## Other copper
Top Layer:
  pour cut-out: 2027.56,4027.56 2027.56,3484.25 1527.56,3484.25 1527.56,4027.56
Bottom Layer:
  pour cut-out: 2027.56,4027.56 2027.56,3484.25 1527.56,3484.25 1527.56,4027.56

## Silkscreen, mask and mechanical layers (free items; w line width, h text height)
Board:
  the board outline again, w10

## Text inside footprints (layer, text, board x,y; h text height)
J1: Top Overlay "1" at 1255.91,4413.39 h31.5 r180; Top Overlay "2" at 1255.91,4313.07 h31.5 r180